# EAGLE board CT_schematic (EAGLE 7.6.0)

Size 100 x 80 mm. Coordinates in mm from the lower left corner, seen from the top.
Outline: 0,0 100,0 100,80 0,80 0,0
Copper layers (1*16): Top 0.035mm / dielectric 1.5mm / Bottom 0.035mm
Design rules "default": minimum track width 10mil, minimum drill 24mil, track to track 8mil, track to pad 8mil, pad to pad 8mil, via to via 8mil, smd to smd 8mil, copper to edge 40mil, drill to drill 8mil, minimum pad ring 10mil, minimum via ring 8mil, stop-mask expansion 4mil, vias tented up to drill 0mil, thermal gap 10mil

## Footprints (pad centres in the part's own frame; a part is rotated, then mirrored left to right if it is on the bottom)
C0603 = smd 0.8 x 0.8: 1 -0.762,0; 2 0.762,0
C0402 = smd 0.5 x 0.5: 1 -0.508,0; 2 0.508,0
C1210 = smd 1.2 x 2.5: 1 -1.524,0; 2 1.524,0
EXV-9H = smd 3.505 x 1.676: 1 -2.857,0; 2 2.857,0
L0603 = smd 0.8 x 0.8: 1 -0.762,0; 2 0.762,0
PJ-037B_PACKAGE = drill 3.7 square: 1 12,0 | drill 3.2 square: 2 6,0
R0603 = smd 0.8 x 0.8: 1 -0.762,0; 2 0.762,0
WLCSP49 = smd 0.25 x 0.25: A1 -1.2,1.2; A2 -0.8,1.2; A3 -0.4,1.2; A4 0,1.2; A5 0.4,1.2; A6 0.8,1.2; A7 1.2,1.2; B1 -1.2,0.8; B2 -0.8,0.8; B3 -0.4,0.8; B4 0,0.8; B5 0.4,0.8; B6 0.8,0.8; B7 1.2,0.8; C1 -1.2,0.4; C2 -0.8,0.4; C3 -0.4,0.4; C4 0,0.4; C5 0.4,0.4; C6 0.8,0.4; C7 1.2,0.4; D1 -1.2,0; D2 -0.8,0; D3 -0.4,0; D4 0,0; D5 0.4,0; D6 0.8,0; D7 1.2,0; E1 -1.2,-0.4; E2 -0.8,-0.4; E3 -0.4,-0.4; E4 0,-0.4; E5 0.4,-0.4; E6 0.8,-0.4; E7 1.2,-0.4; F1 -1.2,-0.8; F2 -0.8,-0.8; F3 -0.4,-0.8; F4 0,-0.8; F5 0.4,-0.8; F6 0.8,-0.8; F7 1.2,-0.8; G1 -1.2,-1.2; G2 -0.8,-1.2; G3 -0.4,-1.2; G4 0,-1.2; G5 0.4,-1.2; G6 0.8,-1.2; G7 1.2,-1.2
SAMTEC_FTSH-105-01-L-DV-K = smd 0.762 x 2.794: 1 -2.54,-2.032; 2 -2.54,2.032; 3 -1.27,-2.032; 4 -1.27,2.032; 5 0,-2.032; 6 0,2.032; 7 1.27,-2.032; 8 1.27,2.032; 9 2.54,-2.032; 10 2.54,2.032
AT24C02D = smd 1.6 x 0.6: 1 -2.475,1.905 | smd 1.55 x 0.6: 2 -2.475,0.635; 3 -2.475,-0.635; 4 -2.475,-1.905; 5 2.475,-1.905; 6 2.475,-0.635; 7 2.475,0.635; 8 2.475,1.905
USB-A-H = drill 0.914: 1 2.718,3.493; 2 2.718,1.003; 3 2.718,-1.003; 4 2.718,-3.493 | drill 2.311: 5 0,-6.566; 6 0,6.566
SOT143B = smd 1 x 0.7: 1 -0.75,-1 | smd 0.6 x 0.7: 2 0.95,-1; 3 0.95,1; 4 -0.95,1
ABS07-32.768KHZ-7-T = smd 1.1 x 2.4: 1 -2.5,0; 2 0,0
ASFL1 = smd 1.7 x 1.5: 1 -1.27,-1.1; 2 1.27,-1.1; 3 1.27,1.1; 4 -1.27,1.1
SOIC-8_EP = smd 1.6 x 0.533: 1 -2.921,1.905; 2 -2.921,0.635; 3 -2.921,-0.635; 4 -2.921,-1.905; 5 2.921,-1.905; 6 2.921,-0.635; 7 2.921,0.635; 8 2.921,1.905 | smd 2.54 x 3.302: EPAD 0,0 | drill 0.406 pad 0.406: P$1 -0.508,0.635; P$2 0.381,0.635; P$3 -0.508,-0.635; P$4 0.381,-0.635
SON-6 = smd 0.55 x 0.3: 1 -0.355,0.5 | smd 0.52 x 0.3: 2 -0.37,0; 3 -0.37,-0.5; 4 0.37,-0.5; 5 0.37,0; 6 0.37,0.5
SW_4-1437565-2 = smd 1.4 x 2.1: 1 -2.23,4.55; 2 -2.23,-4.55; 3 2.23,4.55; 4 2.23,-4.55
LGM67K-G1J2-24-Z = smd 0.8 x 1.4: A -2,0; C 0,0
NC7SZ125M5X = smd 1.3 x 0.7: 1 -1.3,0.95; 2 -1.3,0; 3 -1.3,-0.95; 4 1.3,-0.95; 5 1.3,0.95

## Placement (x,y rotation side)
C1  1e-07  [C0603]  -63.5,57.15 0 top  (outside the outline)
C2  1e-07  [C0603]  -15.24,62.23 0 top  (outside the outline)
C3  1e-07  [C0603]  -19.05,62.23 0 top  (outside the outline)
C4  1e-07  [C0603]  -22.86,62.23 0 top  (outside the outline)
C5  4.7e-06  [C0603]  -59.69,57.15 0 top  (outside the outline)
C6  1e-08  [C0603]  -26.67,62.23 0 top  (outside the outline)
C7  1e-06  [C0603]  -30.48,62.23 0 top  (outside the outline)
C8  1e-07  [C0603]  -34.29,62.23 0 top  (outside the outline)
C9  1e-11  [C0402]  -19.05,67.31 0 top  (outside the outline)
C10  1e-11  [C0402]  -22.86,67.31 0 top  (outside the outline)
C11  1e-07  [C0402]  -26.67,67.31 0 top  (outside the outline)
C12  1e-08  [C0402]  -30.48,67.31 0 top  (outside the outline)
C13  1e-08  [C0402]  -34.29,67.31 0 top  (outside the outline)
C14  1e-05  [C1210]  -57.15,43.18 0 top  (outside the outline)
C15  1e-05  [C1210]  -63.5,43.18 0 top  (outside the outline)
C16  1e-05  [C1210]  -16.51,50.8 0 top  (outside the outline)
C17  1e-05  [C1210]  -22.86,50.8 0 top  (outside the outline)
C18  1e-07  [C0402]  -38.1,67.31 0 top  (outside the outline)
C19  0.0001  [EXV-9H]  -35.56,35.56 0 top  (outside the outline)
C20  0.0001  [EXV-9H]  -46.99,35.56 0 top  (outside the outline)
C21  1e-08  [C0402]  -41.91,67.31 0 top  (outside the outline)
C22  1e-08  [C0402]  -45.72,67.31 0 top  (outside the outline)
F1  240.0  [L0603]  -38.1,62.23 0 top  (outside the outline)
J1  PJ-037B  [PJ-037B_PACKAGE]  -27.94,24.13 0 top  (outside the outline)
R1  10000.0  [R0603]  -59.69,50.8 0 top  (outside the outline)
R2  1000.0  [R0603]  -41.91,62.23 0 top  (outside the outline)
R3  1600.5  [R0603]  -45.72,62.23 0 top  (outside the outline)
R4  4700.0  [R0603]  -49.53,62.23 0 top  (outside the outline)
R5  2200.0  [R0603]  -53.34,62.23 0 top  (outside the outline)
R6  2200.0  [R0603]  -57.15,62.23 0 top  (outside the outline)
R7  10000.0  [R0603]  -64.77,50.8 0 top  (outside the outline)
R8  10000.0  [R0603]  -15.24,57.15 0 top  (outside the outline)
R9  10000.0  [R0603]  -20.32,57.15 0 top  (outside the outline)
R10  10000.0  [R0603]  -25.4,57.15 0 top  (outside the outline)
R11  5.0  [R0603]  -60.96,62.23 0 top  (outside the outline)
R12  10000.0  [R0603]  -30.48,57.15 0 top  (outside the outline)
R13  10000.0  [R0603]  -35.56,57.15 0 top  (outside the outline)
R14  10000.0  [R0603]  -40.64,57.15 0 top  (outside the outline)
R15  10000.0  [R0603]  -45.72,57.15 0 top  (outside the outline)
R16  4031.5447154472  [R0603]  -44.45,50.8 0 top  (outside the outline)
R17  2200.0  [R0603]  -64.77,62.23 0 top  (outside the outline)
R18  10000.0  [R0603]  -50.8,57.15 0 top  (outside the outline)
R19  10000.0  [R0603]  -55.88,57.15 0 top  (outside the outline)
R20  9100.0  [R0603]  -15.24,67.31 0 top  (outside the outline)
R21  680000.0  [R0603]  -49.53,50.8 0 top  (outside the outline)
R22  120000.0  [R0603]  -54.61,50.8 0 top  (outside the outline)
U1  STM32L072CBY6  [WLCSP49]  -64.77,35.56 0 top  (outside the outline)
U2  FTSH-105-01-L-DV-K  [SAMTEC_FTSH-105-01-L-DV-K]  -52.07,7.62 0 top  (outside the outline)
U3  AT24C02D-SSHM-T  [AT24C02D]  -60.96,22.86 0 top  (outside the outline)
U4  61400416021  [USB-A-H]  -19.05,8.89 0 top  (outside the outline)
U5  prtr5v0u2ax  [SOT143B]  -58.42,67.31 0 top  (outside the outline)
U6  ABS07-32.768KHZ-7-T  [ABS07-32.768KHZ-7-T]  -27.94,44.45 0 top  (outside the outline)
U7  ASFL1-25MHZ-NCS  [ASFL1]  -26.67,35.56 0 top  (outside the outline)
U8  MIC5234YME  [SOIC-8_EP]  -36.83,43.18 0 top  (outside the outline)
U9  TPS3895ADRYR  [SON-6]  -62.23,66.04 0 top  (outside the outline)
U10  4-1437565-2  [SW_4-1437565-2]  -44.45,24.13 0 top  (outside the outline)
U11  Q65110A2395  [LGM67K-G1J2-24-Z]  -45.72,43.18 0 top  (outside the outline)
U12  nc7sz125m5x  [NC7SZ125M5X]  -27.94,50.8 0 top  (outside the outline)
U13  nc7sz125m5x  [NC7SZ125M5X]  -34.29,50.8 0 top  (outside the outline)

## Library data of the parts
C1-C22 F1 J1 R1-R22 U1-U13 = circuit_tree

## Nets
CLK_CRYSTAL_U1_C6: C9.1 U1.C6 U6.1
CLK_CRYSTAL_U1_C7: C10.1 U1.C7 U6.2
CLK_U1_D6: U1.D6 U7.3
GND: C1.2 C2.2 C3.2 C4.2 C5.2 C6.2 C7.2 C8.2 C9.2 C10.2 C11.2 C12.2 C13.2 C14.2 C15.2 C16.2 C17.2 C18.2 C19.2 C20.2 C21.2 C22.2 J1.2 R2.2 R7.2 R11.2 R12.2 R14.2 R15.2 R17.2 R20.2 R22.2 U1.D4 U2.3 U2.5 U3.4 U4.4 U4.5 U4.6 U5.1 U7.2 U8.7 U8.EPAD U9.2 U11.C U12.2 U12.3 U13.1 U13.3
NET_U1_A5: R7.1 U1.A5
NET_U1_A6: R6.1 U1.A6 U3.5
NET_U1_B4: R5.1 U1.B4 U3.6
NET_U1_D5: R4.1 U1.D5 U13.4
NET_U1_F7: C6.1 C7.1 F1.1 U1.E6 U1.F7
NET_U1_G6: R3.1 U1.G6 U11.A
NET_U1_G7: R1.1 U1.G7 U10.3 U10.4
NET_U2_9: R11.1 U2.9
NET_U3_1: R13.1 U3.1
NET_U3_2: R14.1 U3.2
NET_U3_3: R15.1 U3.3
NET_U3_7: R12.1 U3.7
NET_U5_4: U4.1 U5.4
NET_U8_4: R16.2 R17.1 U8.4
NET_U9_1: R19.1 R20.1 U9.1
NET_U9_3: R21.2 R22.1 U9.3
NET_U9_4: R18.1 U9.4 U12.4 U13.2
NET_U10_1: R2.1 U10.1 U10.2
PROC_SYS_SWCLK: R9.1 U1.B2 U2.4
PROC_SYS_SWDIO: R10.1 U1.C2 U2.2
PROC_USB_DM: U1.D2 U4.2 U5.3
PROC_USB_DP: U1.B1 U4.3 U5.2
RST_OUT_U2_JTAG_RST_B: R8.1 U2.10 U12.1
VCC_S1_5V1: C14.1 C15.1 C19.1 C20.1 J1.1 U8.5 U8.8
VCC_TIER1_3V3: C1.1 C2.1 C3.1 C4.1 C5.1 C8.1 C11.1 C12.1 C13.1 C16.1 C17.1 C18.1 C21.1 C22.1 F1.2 R1.2 R3.2 R4.2 R5.2 R6.2 R8.2 R9.2 R10.2 R13.2 R16.1 R18.2 R19.2 R21.1 U1.A1 U1.A7 U1.B6 U1.G2 U2.1 U3.8 U7.4 U8.1 U9.6 U12.5 U13.5

## Tracks (layer width: path | path; a pad name or v marks a point on that pad's centre or on a via)
CLK_CRYSTAL_U1_C6  (2 unrouted)
CLK_CRYSTAL_U1_C7  (2 unrouted)
CLK_U1_D6  (1 unrouted)
GND  (48 unrouted)
NET_U1_A5  (1 unrouted)
NET_U1_A6  (2 unrouted)
NET_U1_B4  (2 unrouted)
NET_U1_D5  (2 unrouted)
NET_U1_F7  (4 unrouted)
NET_U1_G6  (2 unrouted)
NET_U1_G7  (3 unrouted)
NET_U2_9  (1 unrouted)
NET_U3_1  (1 unrouted)
NET_U3_2  (1 unrouted)
NET_U3_3  (1 unrouted)
NET_U3_7  (1 unrouted)
NET_U5_4  (1 unrouted)
NET_U8_4  (2 unrouted)
NET_U9_1  (2 unrouted)
NET_U9_3  (2 unrouted)
NET_U9_4  (3 unrouted)
NET_U10_1  (2 unrouted)
PROC_SYS_SWCLK  (2 unrouted)
PROC_SYS_SWDIO  (2 unrouted)
PROC_USB_DM  (2 unrouted)
PROC_USB_DP  (2 unrouted)
RST_OUT_U2_JTAG_RST_B  (2 unrouted)
VCC_S1_5V1  (6 unrouted)
VCC_TIER1_3V3  (38 unrouted)